# Altium PCB jeu_du_moulin_boura_PCB.PcbDoc (part 2 of 2)
Units mm, origin at the board's own origin, x right, y up, seen from the top; angles counter-clockwise.
Board outline 86 x 85 mm, 2 copper layers (Top Layer, Bottom Layer); 79 components, 60 nets, 368 pads, 129 vias.
Unrouted connection lines stored in the file: 22.
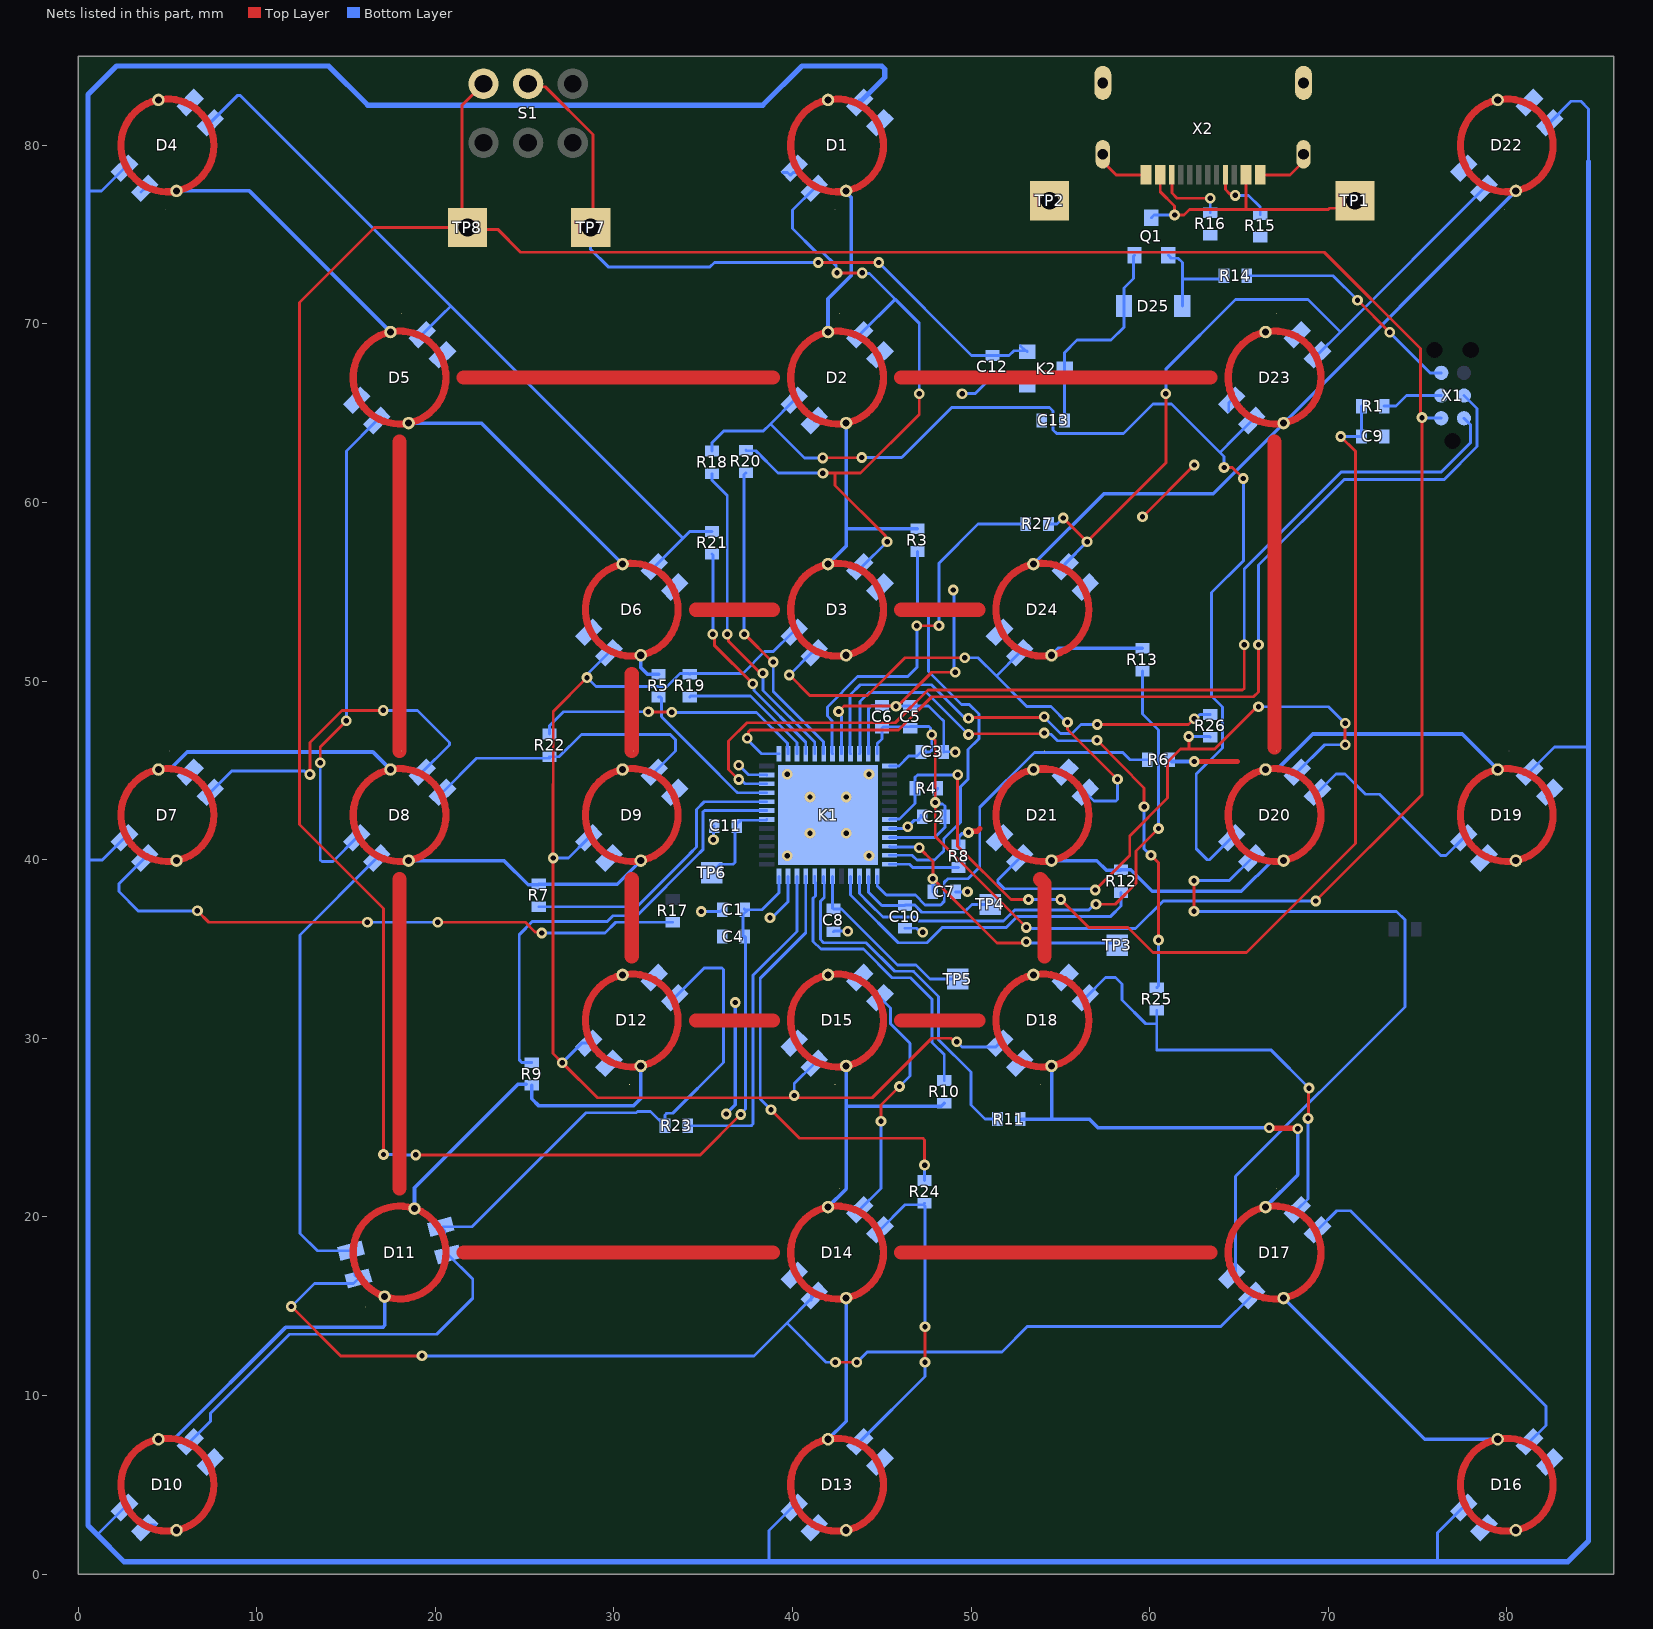
[diagram p2: the nets of this part, all layers, seen from the top]

## Via types
v1: diameter 0.6, hole 0.3, Top Layer to Bottom Layer, tented both sides, 121 vias
v2: diameter 0.6, hole 0.3, Top Layer to Bottom Layer, 8 vias

## Nets (pads, with @x,y where several pads share a name; then routed paths per layer and width w, separated by ;. In a path a pad name is that pad's centre, name@x,y a point inside that pad or via, vN(x,y) a via of type N, cw(c..) or ccw(c..) an arc to the next point about the centre after c; other vN are vias at no path point) (continued)
C2: K1.13 R6.1 | length 22.4
  Bottom Layer w0.16: K1.13@44.75,39.065 44.75,38.523 45.258,38.015 46.883,38.015 47.428,37.47 48.302,37.47 48.502,37.671 48.502,38.734 48.703,38.935 49.837,38.935 50.488,39.586 50.488,42.936 53.552,46 58.5,46 58.9,45.6 R6.1@59.865,45.6
C2_LED: K1.41 R18.1 | length 18.1
  Top Layer w0.16: v1(36.347,52.629) 36.411,52.565 36.411,52.249 38.136,50.523 38.264,50.523 v1(38.348,50.439)
  Bottom Layer w0.16: R18.1@35.5,61.615 35.5,61.25 36.347,60.403 v1(36.347,52.629) ; v1(38.348,50.439) 38.356,50.431 38.356,49.477 41.25,46.583 K1.41@41.25,45.935
C2_TOUCH: D2.6 D5.6 D8.6 D11.6 D14.6 D17.6 D20.6 D23.6 R6.2 | length 124.7
  Top Layer w0.3: v1(62.5,45.5) 64.9,45.5
  Top Layer w0.8: 18,21.6 18,38.9 ; 18,46.1 18,63.4 ; 21.6,18 38.9,18 ; 21.6,67 38.9,67 ; 46.1,18 63.4,18 ; 46.1,67 63.4,67 ; 67,46.298 67,63.4
  Bottom Layer w0.2: R6.2@61.135,45.6 61.235,45.5 v1(62.5,45.5)
C3: K1.12 R8.1 | length 3.9
  Bottom Layer w0.16: K1.12@45.435,39.75 46.55,39.75 46.735,39.565 R8.1@49.3,39.565
C3_LED: K1.39 R19.1 | length 7.7
  Bottom Layer w0.16: R19.1@34.25,49.115 34.3,49.165 37.65,49.165 40.25,46.565 K1.39@40.25,45.935
C3_TOUCH: D3.6 D6.6 D9.6 D12.6 D15.6 D18.6 D21.6 D24.6 R8.2 | length 32.1
  Top Layer w0.3: v1@49.857,41.464 v1(49.857,41.528) 49.915,41.585 50.335,41.585 50.5,41.75
  Top Layer w0.8: 31,34.6 31,38.9 ; 31,46.1 31,50.4 ; 34.6,31 38.9,31 ; 34.6,54 38.9,54 ; 46.1,31 50.4,31 ; 46.1,54 50.4,54 ; D21.6@53.879,38.912 54.121,38.67 D18.6@54.121,34.588
  Bottom Layer w0.2: R8.2@49.3,40.835 49.3,41.275 49.476,41.451 49.781,41.451 v1(49.857,41.528)
GND: C1.2 C2.2 C3.2 C4.2 C5.2 C6.2 C7.2 C8.2 C9.2 C10.2 C11.2 C12.1 C13.1 K1.8 K1.23 K1.35 K1.44 K1.47 K1.49 K2.1 R14.2 R15.1 R16.1 TP2.1 X1.5 X2.A1_B12 X2.B1_A12 X2.S1 X2.S2 X2.S3 X2.S4 | length 67.5
  Top Layer w0.16: v1(42.585,48.3) 42.885,48.6 45.9,48.6 47.8,50.5 v1(49.11,50.5) ; X2.S2@57.38,79.5 57.38,79.1 58.13,78.35 X2.B1_A12@59.8,78.35 ; v1(59.6,59.2) v1(62.5,62.1) ; X2.A1_B12@66.2,78.35 67.87,78.35 68.62,79.1 X2.S3@68.62,79.5 ; v1(71.645,71.334) v1(73.443,69.537)
  Bottom Layer w0.16: v1(34.9,37.1) 35.965,37.1 C1.2@36.065,37.2 ; v1(35.575,41.116) 35.575,41.851 C11.2@35.615,41.891 ; v1(37,45.291) 37.017,45.291 37.548,44.76 38.555,44.76 K1.35@38.565,44.75 ; v1(38.745,36.755) 38.855,36.755 39.75,37.65 K1.23@39.75,39.065 ; C8.2@42.3,35.965 42.335,36 v1(43.1,36) ; v1(42.585,48.3) 42.585,48.181 42.75,48.016 K1.44@42.75,45.935 ; K1.47@44.25,45.935 44.25,48.45 44.435,48.635 C6.2@45.019,48.635 45.054,48.6 v1(45.8,48.6) 47.625,48.6 48.175,48.05 48.186,48.05 48.47,47.766 C3.2@48.47,46.033 48.485,46.048 49.097,46.048 v1(49.117,46.027) ; K1.8@45.435,41.75 46.239,41.75 46.289,41.8 46.408,41.8 46.819,42.211 47.045,42.211 47.19,42.356 47.19,42.475 C2.2@47.265,42.4 ; C10.2@46.3,36.165 46.95,36.165 47.181,35.934 v1(47.3,35.934) ; v1(49,55.1) 49.055,55.045 49.055,50.555 v1(49.11,50.5) ; C7.2@49.135,38.2 v1(49.8,38.2) ; v1(49.5,66.1) 50.235,66.1 51.1,66.965 C12.1@51.2,66.965 ; R14.2@65.435,72.7 70.28,72.7 v1(71.645,71.334) ; v1(73.443,69.537) 75.717,67.263 X1.5@76.335,67.263
  Bottom Layer w0.203: v1(36.301,25.763) 36.301,25.781 36.8,26.281 v1(36.8,32.004)
  other v1: 46.453,41.845
  other v2: 39.715,40.215 44.285,40.215 40.985,41.485 43.015,41.485 40.985,43.515 43.015,43.515 39.715,44.785 44.285,44.785
L1: K1.11 R3.1 | length 22.6
  Bottom Layer w0.16: K1.11@45.435,40.25 46.7,40.25 46.975,39.975 47.963,39.975 48.16,40.172 48.47,40.482 48.47,41.168 48.57,41.268 48.57,41.272 48.763,41.465 48.767,41.465 49.422,42.12 49.422,44.101 49.83,44.51 49.83,46.165 50.44,46.775 50.44,48.164 49.904,48.7 49.466,48.7 47.626,50.54 47.626,51.665 47.625,51.666 47.625,53.675 47,54.3 R3.1@47,57.265
L1_LED: K1.42 R20.2 | length 17.7
  Top Layer w0.16: v1(37.297,52.629) 37.334,52.629 38.891,51.072 v1(38.928,51.072)
  Bottom Layer w0.16: v1(37.297,52.629) 37.297,61.562 R20.2@37.4,61.665 ; v1(38.928,51.072) 38.928,49.414 41.75,46.592 K1.42@41.75,45.935
L1_TOUCH: D1.5 D2.5 D3.5 R3.2 | length 20.9
  Bottom Layer w0.2: D3.5@41.993,56.55 43.007,57.565 43.007,58.5 ; D2.5@41.993,69.55 41.993,71.406 43.303,72.716 43.303,77.083 43.007,77.378 D1.5@43.007,77.45 ; D2.5@43.007,64.45 43.007,58.5 ; R3.2@47,58.535 43.042,58.535 43.007,58.5
L2: K1.33 R5.1 | length 8.9
  Bottom Layer w0.16: R5.1@32.5,49.115 32.6,49.115 32.67,49.045 32.67,48.01 35.89,44.79 35.89,44.778 36.757,43.911 36.759,43.911 36.92,43.75 K1.33@38.565,43.75
L2_LED: K1.40 R21.2 | length 13.4
  Top Layer w0.16: v1(35.545,52.629) 35.626,52.547 35.626,52.009 v1(37.776,49.859)
  Bottom Layer w0.16: R21.2@35.5,57.115 35.545,57.07 v1(35.545,52.629) ; v1(37.776,49.859) 37.842,49.793 37.842,49.482 40.75,46.574 K1.40@40.75,45.935
L2_TOUCH: D4.5 D5.5 D6.5 R5.2 | length 32.4
  Bottom Layer w0.2: D4.5@5.507,77.45 9.593,77.45 D5.5@17.493,69.55 ; D5.5@18.507,64.45 22.593,64.45 D6.5@30.493,56.55 ; D6.5@31.507,51.45 31.507,50.763 31.885,50.385 R5.2@32.5,50.385
L3: K1.32 R7.1 | length 16.4
  Bottom Layer w0.16: R7.1@25.8,37.365 31.29,37.365 34.25,40.325 34.25,40.33 34.623,40.704 34.623,42.805 35.066,43.249 K1.32@38.564,43.249
L3_LED: K1.38 R22.2 | length 15.4
  Top Layer w0.16: v1(31.936,48.283) 31.952,48.266 33.234,48.266 v1(33.25,48.25)
  Bottom Layer w0.16: R22.2@26.4,47.035 26.4,47.5 27.183,48.283 v1(31.936,48.283) ; v1(33.25,48.25) 37.985,48.25 39.715,46.52 39.715,46.285 39.75,46.25 K1.38@39.75,45.935
L3_TOUCH: D7.5 D8.5 D9.5 R7.2 | length 27.9
  Bottom Layer w0.2: D7.5@4.493,45.05 5.138,45.05 6.12,46.032 16.511,46.032 D8.5@17.493,45.05 ; D8.5@18.507,39.95 23.85,39.95 25.2,38.6 25.765,38.6 R7.2@25.8,38.635 30.192,38.635 D9.5@31.507,39.95
L4: K1.31 R9.1 | length 25.7
  Bottom Layer w0.16: R9.1@25.4,28.635 24.865,28.635 24.7,28.8 24.7,35.8 25.45,36.55 29.649,36.55 29.959,36.86 31.293,36.86 34.61,40.176 34.61,40.181 34.983,40.555 34.983,42.656 35.077,42.75 K1.31@38.565,42.75
L4_LED: K1.22 R23.2 | length 18.6
  Bottom Layer w0.16: R23.2@34.135,25.1 37.696,25.1 37.79,25.194 37.79,33.528 40.25,35.988 K1.22@40.25,39.065
L4_TOUCH: D10.5 D11.5 D12.5 R9.2 | length 35.8
  Bottom Layer w0.2: D10.5@4.493,7.55 5.358,7.55 11.617,13.809 17.047,13.809 17.164,13.926 D11.5@17.164,15.538 ; D11.5@18.836,20.462 18.836,21.636 24.617,27.417 R9.2@25.082,27.417 ; R9.2@25.4,27.365 25.4,26.619 25.806,26.213 31.09,26.213 31.507,26.63 D12.5@31.507,28.45
L5: K1.20 R10.1 | length 16.5
  Bottom Layer w0.16: K1.20@41.25,39.065 41.25,38.75 41.285,38.715 41.285,37.967 41.16,37.842 41.16,35.429 41.595,34.994 43.979,34.994 45.58,33.392 46.617,33.392 47.824,32.185 47.824,29.767 48.5,29.091 R10.1@48.5,27.635
L5_LED: K1.21 R24.2 | length 25.9
  Top Layer w0.16: v1(38.8,26) 40.4,24.4 47.306,24.4 47.4,24.306 v1(47.4,22.9)
  Bottom Layer w0.16: v1(38.8,26) 38.2,26.6 38.2,33.358 40.75,35.908 K1.21@40.75,39.065 ; R24.2@47.4,22.035 v1(47.4,22.9)
L5_TOUCH: D13.5 D14.5 D15.5 R10.2 | length 22.2
  Bottom Layer w0.2: D13.5@41.993,7.55 43.007,8.565 D14.5@43.007,15.45 ; D14.5@41.993,20.55 43.007,21.565 43.007,26.2 ; D15.5@43.007,28.45 43.007,26.2 ; R10.2@48.5,26.365 48.335,26.2 43.007,26.2
L6: K1.19 R11.1 | length 20.2
  Bottom Layer w0.16: K1.19@41.75,39.065 41.75,38.75 41.785,38.715 41.785,37.887 41.57,37.672 41.57,35.528 41.744,35.354 44.128,35.354 45.73,33.752 46.766,33.752 46.86,33.659 48.184,32.334 48.184,29.916 49.99,28.11 49.99,26.26 50.775,25.476 R11.1@51.486,25.476
L6_LED: K1.46 R25.2 | length 32.9
  Top Layer w0.16: v1(49.86,47.015) 49.898,47.054 54.062,47.054 v1(54.1,47.092) ; v1(57.057,46.695) 59.693,44.015 v1(59.693,42.96) ; v1(60.08,40.25) 60.5,39.83 v1(60.5,35.5)
  Bottom Layer w0.16: K1.46@43.75,45.935 43.785,45.97 43.785,48.866 44.284,49.365 47.511,49.365 v1(49.86,47.015) ; v1(54.1,47.092) 54.166,47.026 54.477,47.026 54.843,46.66 55.831,46.66 55.833,46.662 57.02,46.662 v1@57.055,46.696 ; v1(59.693,42.96) 59.693,40.616 60.059,40.25 v1(60.08,40.25) ; R25.2@60.4,32.835 60.5,32.935 v1(60.5,35.5)
L6_TOUCH: D16.5 D17.5 D18.5 R11.2 | length 39.1
  Top Layer w0.3: v1(66.705,24.989) 66.732,24.962 68.265,24.962 v1(68.292,24.934)
  Bottom Layer w0.2: R11.2@52.756,25.476 54.532,25.476 ; D18.5@54.507,28.45 54.532,28.425 54.532,25.476 ; D17.5@66.493,20.55 68.292,22.349 v1(68.292,24.934) ; v1(66.705,24.989) 57.111,24.989 56.624,25.476 54.532,25.476 ; D17.5@67.507,15.45 75.407,7.55 D16.5@79.493,7.55
L7: K1.16 R12.1 | length 18.9
  Bottom Layer w0.16: K1.16@43.25,39.065 43.25,38.032 43.644,37.637 45.927,35.354 47.54,35.354 48.39,36.204 51.975,36.204 52.601,36.83 57.83,36.83 58.4,37.4 R12.1@58.4,38.165
L7_LED: K1.45 R26.2 | length 25.3
  Top Layer w0.16: v1(49.86,47.923) 49.899,47.962 54.08,47.962 v1@54.1,47.942 ; v1(57.068,47.572) 62.172,47.572 v1(62.5,47.9)
  Bottom Layer w0.16: K1.45@43.25,45.935 43.215,45.97 43.215,49.215 43.8,49.8 47.786,49.8 49.579,48.008 49.776,48.008 v1(49.86,47.923) ; v1@54.1,47.942 54.141,47.942 55.013,47.07 55.661,47.07 56.163,47.572 v1(57.068,47.572) ; v1(62.5,47.9) 62.579,47.9 62.814,48.135 R26.2@63.4,48.135
  other v1: 54.1,48
L7_TOUCH: D19.5 D20.5 D21.5 R12.2 | length 30.4
  Top Layer w0.4: D21.5@53.438,45.05 D21.5@53.491,45.05 ; D21.5@53.493,45.05 54.561,45.05 ; D21.5@54.509,39.95 54.562,39.95 D21.5@54.576,39.965
  Bottom Layer w0.2: D21.5@54.507,40.066 D21.5@54.507,39.95 57.05,39.95 57.6,39.4 58.365,39.4 R12.2@58.4,39.435 58.939,39.435 60.147,38.227 65.139,38.227 66.862,39.95 D20.5@67.507,39.95 ; D20.5@66.493,45.05 67.138,45.05 69.129,47.041 77.502,47.041 D19.5@79.493,45.05
L8: K1.15 R13.1 | length 30.7
  Top Layer w0.16: v1(57,37.505) 58.075,37.505 59.245,38.675 59.245,40.495 v1(60.5,41.75)
  Bottom Layer w0.16: K1.15@43.75,39.065 43.75,38.111 44.325,37.536 45.066,36.795 46.837,36.795 47.068,36.564 51.826,36.564 52.452,37.19 56.591,37.19 56.906,37.505 v1(57,37.505) ; R13.1@59.6,50.565 59.6,48.152 60.495,47.257 60.495,41.755 v1(60.5,41.75)
L8_LED: K1.43 R27.2 | length 21.5
  Top Layer w0.16: v1(46.968,53.1) v1(48.205,53.1)
  Bottom Layer w0.16: K1.43@42.25,45.935 42.215,45.97 42.215,47.779 41.955,48.039 41.955,48.561 43.652,50.258 46.458,50.258 46.973,50.773 46.973,53.095 v1(46.968,53.1) ; v1(48.205,53.1) 48.205,56.605 50.4,58.8 R27.2@53.065,58.8
L8_TOUCH: D22.5 D23.5 D24.5 R13.2 | length 40.9
  Bottom Layer w0.2: D24.5@53.493,56.55 57.443,60.5 63.557,60.5 D23.5@67.507,64.45 D22.5@80.507,77.45 ; D24.5@54.507,51.45 54.892,51.835 R13.2@59.6,51.835
NetC7_1: C7.1 K1.10 TP3.1 | length 16.4
  Top Layer w0.16: v1(47.098,40.672) 47.865,39.905 v1(47.865,38.935) 51.458,35.342 53.033,35.342 v1(53.1,35.409)
  Bottom Layer w0.16: K1.10@45.435,40.75 45.474,40.711 47.059,40.711 v1(47.098,40.672) ; C7.1@47.865,38.2 v1(47.865,38.935) ; v1(53.1,35.409) 53.167,35.342 58.037,35.342 TP3.1@58.181,35.198
NetC8_1: C8.1 K1.18 TP5.1 | length 10.4
  Bottom Layer w0.16: K1.18@42.25,39.065 42.25,37.285 C8.1@42.3,37.235 42.756,37.235 45.879,34.112 46.915,34.112 47.709,33.319 TP5.1@49.266,33.319
NetC10_1: C10.1 K1.14 TP4.1 | length 8.4
  Bottom Layer w0.16: K1.14@44.25,39.065 44.25,38.191 44.735,37.706 45.006,37.435 C10.1@46.3,37.435 46.321,37.456 46.846,37.456 47.242,37.06 49.615,37.06 50.049,37.494 TP4.1@51.09,37.494
NetC11_1: C11.1 K1.30 TP6.1 | length 5.5
  Bottom Layer w0.16: TP6.1@35.473,39.262 35.955,39.744 36.681,39.744 36.775,39.838 36.775,41.781 C11.1@36.885,41.891 36.885,41.991 37.105,42.211 38.526,42.211 K1.30@38.565,42.25
NetC12_2: C12.2 K2.2 S1.2 TP7.1 | length 39.8
  Top Layer w0.16: S1.2@25.2,83.45 25.363,83.287 26.162,83.287 28.83,80.619 28.83,75.53 28.166,74.866 TP7.1@28.166,74.725 ; v1(41.453,73.44) v1(44.831,73.44)
  Bottom Layer w0.16: TP7.1@28.7,75.4 28.7,74.188 29.688,73.2 35.391,73.2 35.631,73.44 v1(41.453,73.44) ; v1(44.831,73.44) 50.036,68.235 C12.2@51.2,68.235 52.135,68.235 52.4,68.5 K2.2@53.05,68.5 ; K2.2@52.78,68.77 K2.2@53.05,68.5 ; K2.2@53.15,68.45 53.1,68.5 K2.2@53.05,68.5
NetC13_2: C13.2 D25.1 K2.3 Q1.2 | length 12
  Bottom Layer w0.16: C13.2@55.235,64.6 K2.3@55.235,67.485 ; K2.3@55.25,67.5 K2.3@55.235,67.485 ; Q1.2@59.15,73.85 59.1,73.8 59.1,72.548 58.565,72.013 D25.1@58.565,71 58.565,69.817 57.848,69.1 55.943,69.1 55.235,68.392 K2.3@55.235,67.485
NetD1_1: D1.1 D1.4 D2.1 D2.4 D3.1 D3.4 R20.1 | length 44.9
  Top Layer w0.16: v1(41.707,61.646) 42.393,61.646 ; v1(42.494,72.86) v1(43.903,72.86) ; v1(45.3,57.8) 45.216,57.884 45.216,58.137 42.393,60.96 42.393,61.646 ; v1(47.1,66.1) 47.1,64.931 43.815,61.646 42.393,61.646
  Bottom Layer w0.16: R20.1@37.4,62.935 37.435,62.9 37.944,62.9 39.198,61.646 v1(41.707,61.646) ; D1.1@39.46,78.487 39.728,78.487 39.884,78.331 40.044,78.491 40.312,78.491 40.472,78.331 40.492,78.331 ; D1.1@40.096,78.727 40.492,78.331 ; v1(42.494,72.86) 42.452,72.902 42.452,73.261 41.693,74.02 41.334,74.02 40.005,75.349 40.005,76.374 D1.4@41.227,77.596 40.492,78.331 ; v1(43.903,72.86) 43.932,72.83 44.315,72.83 45.745,71.399 ; D3.1@44.904,55.273 D3.4@43.773,56.404 43.904,56.404 v1(45.3,57.8) ; D2.1@44.904,68.273 D2.4@43.773,69.404 45.757,71.388 47.1,70.045 ; v1(47.1,66.1) 47.1,70.029
NetD1_2: D1.2 D1.3 D4.2 D4.3 D7.2 D7.3 D10.2 D10.3 D13.2 D13.3 D16.2 D16.3 D19.2 D19.3 D22.2 D22.3 R17.2 | length 365.4
  Top Layer w0.16: v1(6.68,37.135) 7.315,36.5 v1(16.2,36.5) ; v1(20.142,36.5) 25.044,36.5 25.585,35.959 25.911,35.959 v1(25.97,35.9)
  Bottom Layer w0.16: 0.55,40.068 0.639,39.98 1.348,39.98 D7.3@2.596,41.227 D7.2@3.727,40.096 2.286,38.655 2.286,38.219 3.37,37.135 v1(6.68,37.135) ; 0.55,77.419 0.575,77.445 1.313,77.445 D4.3@2.596,78.727 D4.2@3.727,77.596 D4.2@3.515,77.384 ; 0.999,2.269 1.138,2.269 D10.3@2.596,3.727 D10.2@3.727,2.596 3.873,2.741 D10.2@4.325,2.741 ; v1(16.2,36.5) v1(20.142,36.5) ; v1(25.97,35.9) 29.508,35.9 30.108,36.5 R17.2@33.299,36.5 ; 38.633,0.686 38.684,0.737 38.684,2.438 39.973,3.727 D13.3@40.096,3.727 D13.2@41.227,2.596 ; D1.2@43.773,82.486 D1.2@43.773,82.404 D1.3@44.904,81.273 ; 76.124,0.686 76.124,2.311 77.54,3.727 D16.3@77.596,3.727 D16.2@78.727,2.596 D16.2@78.699,2.596 ; D22.2@81.273,82.404 D22.3@82.404,81.273 83.605,82.474 84.15,82.474 84.582,82.042 84.582,79.095 ; D19.3@82.404,43.773 D19.2@81.273,44.904 82.673,46.304 84.557,46.304 84.582,46.279
  Bottom Layer w0.3: D1.2@43.773,82.486 43.855,82.486 45.169,83.8 45.169,84.274 44.993,84.45 40.533,84.45 38.333,82.25 16.229,82.25 14.029,84.45 2.159,84.45 0.55,82.841 0.55,77.419 0.55,40.068 0.55,2.718 0.999,2.269 2.582,0.686 38.633,0.686 76.124,0.686 83.411,0.686 84.582,1.857 84.582,46.279 84.582,79.095
NetD2_2: D2.2 D2.3 D5.2 D5.3 D8.2 D8.3 D11.2 D11.3 D14.2 D14.3 D17.2 D17.3 D20.2 D20.3 D23.2 D23.3 R18.2 | length 240.7
  Top Layer w0.16: v1(11.942,14.982) 14.707,12.217 v1(19.253,12.217) ; v1(13.56,45.432) 13.56,46.319 v1(15.023,47.782) ; v1(41.7,62.5) 41.713,62.513 43.862,62.513 v1(43.875,62.526) ; v1(42.407,11.862) v1(43.607,11.862) ; v1(62.484,37.108) v1(62.484,38.827) ; v1(64.173,61.964) 64.63,61.964 v1(65.25,61.344)
  Bottom Layer w0.16: v1(11.942,14.982) 13.233,16.274 15.415,16.274 D11.2@15.696,16.554 15.489,16.761 15.489,17.893 D11.3@15.282,18.1 13.396,18.1 12.421,19.075 12.421,35.789 D8.2@16.727,40.096 D8.3@15.596,41.227 14.265,39.896 13.654,39.896 13.56,39.99 v1(13.56,45.432) ; v1(15.023,47.782) 15.023,62.892 D5.2@16.727,64.596 D5.3@15.596,65.727 ; v1(19.253,12.217) 37.849,12.217 39.689,14.058 ; R18.2@35.5,62.885 35.5,63.35 36.15,64 38.369,64 38.772,64.403 ; D14.3@40.096,16.727 41.058,15.765 D14.2@41.058,15.427 ; D14.2@41.058,15.341 D14.2@41.058,15.427 ; D14.2@41.227,15.596 D14.2@41.058,15.427 ; D2.2@41.227,64.555 D2.2@41.227,64.596 D2.3@40.096,65.727 38.772,64.403 ; v1(41.7,62.5) 40.675,62.5 38.772,64.403 ; v1(42.407,11.862) 41.885,11.862 39.689,14.058 ; v1(43.607,11.862) 44.187,12.442 51.736,12.442 53.165,13.871 64.002,13.871 D17.2@65.727,15.596 D17.3@64.596,16.727 64.808,16.939 64.808,22.271 74.295,31.758 74.295,36.637 73.824,37.108 v1(62.484,37.108) ; v1(43.875,62.526) 46.117,62.526 48.922,65.33 54.402,65.33 54.6,65.132 54.6,64.068 54.798,63.87 58.542,63.87 60.187,65.515 61.236,65.515 63.942,62.81 ; v1(62.484,38.827) 64.458,38.827 D20.2@65.727,40.096 D20.3@64.596,41.227 63.363,39.995 63.231,39.995 62.612,40.614 62.612,44.791 64.08,46.26 64.08,48.551 63.471,49.16 63.471,54.96 65.25,56.739 v1(65.25,61.344) ; v1(64.173,61.964) 64.173,62.579 63.942,62.81 ; D23.3@64.436,65.115 64.436,65.567 D23.3@64.596,65.727 D23.2@65.727,64.596 64.784,63.653 63.942,62.81 ; 39.689,14.058 D14.2@41.058,15.427
NetD3_2: D3.2 D3.3 D6.2 D6.3 D9.2 D9.3 D12.2 D12.3 D15.2 D15.3 D18.2 D18.3 D21.2 D21.3 D24.2 D24.3 R19.2 | length 113.8
  Top Layer w0.16: v1(28.499,50.199) 26.603,48.304 26.603,44.227 26.6,44.224 v1(26.6,40.1) 26.6,29.146 v1(27.112,28.634) 29.076,26.67 39.851,26.67 39.981,26.8 v1(40.1,26.8) 40.219,26.8 40.349,26.67 44.47,26.67 47.8,30 48.886,30 49.086,29.8 v1(49.2,29.8) ; v1(39.827,50.343) 40.97,49.2 44.2,49.2 46.308,51.308 v1(49.657,51.308) ; v1(55.4,47.7) 55.412,47.688 55.412,47.288 v1(58.2,44.5)
  Bottom Layer w0.16: v1(26.6,40.1) 27.469,40.1 D9.3@28.596,41.227 D9.2@29.727,40.096 ; v1(27.112,28.634) 28.206,29.727 D12.3@28.596,29.727 D12.2@29.727,28.596 ; D6.3@28.596,52.727 D6.2@29.727,51.596 28.583,50.452 28.583,50.283 v1(28.499,50.199) 28.993,49.705 32.973,49.705 33.703,50.435 34.2,50.435 R19.2@34.25,50.385 34.3,50.435 37.227,50.435 38.444,51.652 38.924,51.652 39.999,52.727 D3.3@40.096,52.727 D3.2@41.227,51.596 41.08,51.596 v1(39.827,50.343) ; D15.3@40.096,29.727 D15.2@41.227,28.596 ; v1(40.1,26.8) 40.1,27.462 D15.2@41.227,28.589 ; v1(49.2,29.8) 49.213,29.8 49.498,29.515 51.384,29.515 D18.3@51.596,29.727 D18.2@52.727,28.596 ; v1(49.657,51.308) 50.397,51.308 51.418,50.287 ; D24.3@51.596,52.727 D24.2@52.727,51.596 51.418,50.287 ; D21.2@55.273,44.904 D21.3@56.404,43.773 56.895,43.282 58.106,43.282 58.2,43.375 v1(58.2,44.5) ; v1(55.4,47.7) 55.353,47.7 54.473,48.58 53.125,48.58 51.418,50.287
NetD4_1: D4.1 D4.4 D5.1 D5.4 D6.1 D6.4 R21.1 | length 48.4
  Bottom Layer w0.16: D4.4@6.273,82.404 D4.1@7.404,81.273 8.935,82.804 9.068,82.804 15.685,76.187 20.892,70.98 33.87,58.002 ; D5.1@20.404,68.273 D5.4@19.273,69.404 20.413,70.544 20.798,70.929 ; D6.1@33.404,55.273 D6.4@32.273,56.404 33.87,58.002 ; R21.1@35.5,58.385 34.254,58.385 33.87,58.002
NetD7_1: D7.1 D7.4 D8.1 D8.4 D9.1 D9.4 R22.1 | length 41.1
  Top Layer w0.16: v1(12.98,44.777) 12.98,46.559 14.783,48.362 v1(17.094,48.362)
  Bottom Layer w0.16: D7.4@6.273,44.904 D7.1@7.404,43.773 8.589,44.958 12.679,44.958 12.861,44.777 v1(12.98,44.777) ; v1(17.094,48.362) 18.999,48.362 20.798,46.562 20.798,46.43 D8.4@19.273,44.904 D8.1@20.404,43.773 22.311,45.68 R22.1@26.4,45.68 ; R22.1@26.4,45.765 26.93,45.765 28.181,47.015 33.155,47.015 33.452,46.719 33.452,46.083 D9.4@32.273,44.904 D9.1@33.404,43.773
NetD10_1: D10.1 D10.4 D11.1 D11.4 D12.1 D12.4 R23.1 | length 56.4
  Bottom Layer w0.16: D10.1@7.404,6.273 D10.4@6.273,7.404 7.404,8.536 7.404,8.988 11.845,13.429 20.084,13.429 22.098,15.443 22.098,16.521 D11.1@20.718,17.9 ; D11.1@20.511,18.107 20.511,19.239 D11.4@20.304,19.446 22.062,19.446 28.449,25.833 31.247,25.833 31.322,25.908 32.057,25.908 R23.1@32.865,25.1 32.865,25.713 32.959,25.806 33.299,25.806 36.144,28.651 36.144,33.841 36.05,33.934 35.066,33.934 D12.1@33.404,32.273 D12.4@32.273,33.404
NetD13_1: D13.1 D13.4 D14.1 D14.4 D15.1 D15.4 R24.1 | length 36.5
  Top Layer w0.16: v1(44.958,25.349) 44.958,26.267 v1(45.995,27.305) ; v1(47.422,11.862) v1(47.422,13.843)
  Bottom Layer w0.16: D15.4@43.773,33.404 D15.1@44.904,32.273 45.488,31.689 45.488,30.814 46.584,29.718 46.584,27.893 v1(45.995,27.305) ; D13.1@44.904,6.273 D13.4@43.773,7.404 47.422,11.053 v1(47.422,11.862) ; v1(44.958,25.349) 44.958,21.589 D14.4@43.773,20.404 D14.1@44.904,19.273 46.313,20.681 47.335,20.681 47.422,20.594 v1(47.422,13.843) ; R24.1@47.335,20.7 R24.1@47.4,20.765
NetD16_1: D16.1 D16.4 D17.1 D17.4 D18.1 D18.4 R25.1 | length 49.7
  Top Layer w0.16: v1(68.872,25.514) 68.9,25.543 68.9,27.183 v1(68.928,27.211)
  Bottom Layer w0.16: D18.4@55.273,33.404 D18.1@56.404,32.273 57.532,33.401 58.09,33.401 58.458,33.033 58.458,32.14 59.786,30.811 60.4,30.811 ; R25.1@60.4,31.565 60.4,30.811 ; v1(68.872,25.514) 68.872,21.003 D17.4@68.273,20.404 D17.1@69.404,19.273 70.477,20.345 71.247,20.345 82.194,9.398 82.194,8.326 D16.4@81.273,7.404 D16.1@82.404,6.273 ; v1(68.928,27.211) 66.785,29.354 60.4,29.354 60.4,30.811
NetD19_1: D19.1 D19.4 D20.1 D20.4 D21.1 D21.4 R26.1 | length 50.1
  Top Layer w0.16: v1(56.957,38.304) 58.885,40.232 58.885,41.333 61,43.447 61,45.465 61.735,46.2 62.2,46.2 ; v1(62.2,46.9) 62.2,46.2 ; v1(66.1,48.565) 66.015,48.565 63.65,46.2 62.2,46.2 ; v1(70.95,46.441) v1(70.95,47.641)
  Bottom Layer w0.16: D21.1@51.596,41.227 D21.4@52.727,40.096 51.501,38.87 51.501,38.737 51.865,38.374 56.887,38.374 v1(56.957,38.304) ; v1(62.2,46.9) 63.365,46.9 R26.1@63.4,46.865 ; v1(66.1,48.565) 70.026,48.565 v1(70.95,47.641) ; v1(70.95,46.441) 69.809,46.441 D20.4@68.273,44.904 D20.1@69.404,43.773 70.437,44.806 70.942,44.806 72.085,43.663 72.873,43.663 76.302,40.234 76.602,40.234 D19.1@77.596,41.227 D19.4@78.727,40.096
NetD22_1: D22.1 D22.4 D23.1 D23.4 D24.1 D24.4 R27.1 | length 46.4
  Top Layer w0.16: v1(55.162,59.138) v1(56.501,57.801) ; v1(56.501,57.801) 60.909,62.21 v1(60.909,66.095)
  Bottom Layer w0.16: R27.1@54.335,58.8 54.823,58.8 v1(55.162,59.138) ; D24.1@56.404,55.273 D24.4@55.273,56.404 55.273,56.573 v1(56.501,57.801) ; v1(60.909,66.095) 60.909,67.462 64.811,71.364 68.877,71.364 70.686,69.555 ; D23.4@68.273,69.404 D23.1@69.404,68.273 70.686,69.555 ; D22.1@77.596,78.727 D22.4@78.727,77.596 70.686,69.555
NetD25_2: D25.2 Q1.1 R14.1 | length 5.8
  Bottom Layer w0.16: Q1.1@61.05,73.85 61.216,73.684 61.596,73.684 61.835,73.445 61.835,72.516 ; D25.2@61.835,71 61.835,72.516 ; R14.1@64.165,72.7 63.981,72.516 61.835,72.516
NetQ1_3: Q1.3 TP1.1 X2.A4_B9 X2.B4_A9 | length 16.3
  Top Layer w0.16: X2.B4_A9@60.6,78.35 60.6,77.4 61.4,76.6 v1(61.4,76.1) 61.929,76.1 62.241,76.412 65.4,76.412 ; X2.A4_B9@65.4,78.35 65.4,76.412 ; TP1.1@71.5,76.75 71.23,76.48 70.08,76.48 70.012,76.412 65.4,76.412
  Bottom Layer w0.16: Q1.3@60.1,75.95 60.25,76.1 v1(61.4,76.1)
NetR1_2: R1.2 X1.3 | length 3.4
  Bottom Layer w0.16: R1.2@73.135,65.4 73.8,65.4 74.393,65.993 X1.3@76.335,65.993
NetR15_2: R15.2 X2.A5 | length 3.6
  Top Layer w0.16: X2.A5@64.25,78.35 64.25,77.527 64.493,77.284 64.716,77.284 v1(64.8,77.2)
  Bottom Layer w0.16: v1(64.8,77.2) 65.542,77.2 66.2,76.542 R15.2@66.2,76.135
NetR16_2: R16.2 X2.B5 | length 4.1
  Top Layer w0.16: X2.B5@61.25,78.35 61.25,77.336 61.544,77.042 v1(63.4,77.042)
  Bottom Layer w0.16: R16.2@63.4,76.235 v1(63.4,77.042)
R\S\T\: C9.1 K1.7 R1.1 R4.2 | length 63
  Top Layer w0.16: v1(49.25,44.75) 49.25,40.754 52.234,37.77 v1(53.221,37.77) ; v1(55.021,37.77) 56.591,36.2 58.8,36.2 60.2,34.8 65.424,34.8 71.53,40.906 71.53,62.87 v1(70.7,63.7)
  Bottom Layer w0.16: K1.7@45.435,42.25 45.47,42.285 46.002,42.285 46.865,43.148 46.865,44.615 47,44.75 v1(49.25,44.75) ; v1(53.221,37.77) v1(55.021,37.77) ; v1(70.7,63.7) C9.1@71.865,63.7 R1.1@71.865,65.4
SWCLK: K1.37 X1.4 | length 57.3
  Top Layer w0.16: v1(37.47,46.8) 37.547,46.877 37.547,47.166 37.641,47.26 45.931,47.26 47.799,49.128 65.828,49.128 66.1,49.4 v1(66.1,52.045)
  Bottom Layer w0.16: v1(37.47,46.8) 37.47,46.73 38.265,45.935 K1.37@39.25,45.935 ; v1(66.1,52.045) 66.1,56.5 70.9,61.3 76.5,61.3 78.335,63.135 78.335,65.263 X1.4@77.605,65.993
SWDIO: K1.34 X1.2 | length 58
  Top Layer w0.16: v1(36.997,44.491) 36.98,44.491 36.42,45.051 36.42,45.531 36.422,45.534 36.422,46.643 37.449,47.67 38.495,47.67 45.761,47.67 47.591,49.5 65.206,49.5 65.3,49.594 v1(65.3,52.045)
  Bottom Layer w0.16: v1(36.997,44.491) 37.098,44.491 37.339,44.25 K1.34@38.565,44.25 ; v1(65.3,52.045) 65.3,56.28 67.942,58.922 70.73,61.71 76.33,61.71 77.97,63.35 77.97,64.357 X1.2@77.605,64.723
VCC: C1.1 C2.1 C3.1 C4.1 C5.1 C6.1 K1.1 K1.9 K1.24 K1.48 R4.1 S1.3 TP8.1 X1.1 | length 240.2
  Top Layer w0.16: v1(17.1,23.495) 17.1,37.276 12.4,41.976 12.4,71.2 16.6,75.4 TP8.1@21.8,75.4 21.9,75.3 23.5,75.3 24.78,74.02 69.78,74.02 75.174,68.626 75.174,64.838 v1(75.253,64.758) 75.253,43.641 v1(69.3,37.688) ; v1(18.9,23.47) 34.84,23.47 v1(37.1,25.73) ; TP8.1@21.8,75.6 21.5,75.9 21.5,82.25 S1.3@22.7,83.45 ; v1(47.8,47) 47.8,46.881 48,46.681 v1(48,43.2) 48,41.309 50.725,38.584 v1(53.1,36.209)
  Bottom Layer w0.16: v1(17.1,23.495) 18.09,23.495 18.115,23.47 v1(18.9,23.47) ; v1(37.1,25.73) 37.1,25.753 37.38,26.033 37.38,35.655 C4.1@37.335,35.7 ; C4.1@37.285,35.65 37.235,35.7 37.235,36.935 C1.1@37.5,37.2 ; C1.1@37.3,37.235 C1.1@37.335,37.2 C1.1@37.5,37.2 ; K1.24@39.25,39.065 39.25,38.15 38.3,37.2 C1.1@37.5,37.2 ; K1.48@44.75,45.935 44.75,46.5 45.019,46.769 C6.1@45.019,47.365 45.1,47.446 46.581,47.446 46.6,47.465 47.634,47.465 47.728,47.371 47.728,47.072 v1(47.8,47) 47.8,46.126 47.706,46.033 C3.1@47.2,46.033 47.2,46.025 46.98,45.805 46.515,45.805 45.96,45.25 K1.1@45.435,45.25 ; K1.9@45.437,41.252 47.97,41.252 48.535,41.817 48.535,43.006 48.412,43.129 48.071,43.129 v1(48,43.2) 48,43.865 R4.1@48.135,44 ; v1(53.1,36.209) 53.168,36.142 59.216,36.142 60.762,37.688 v1(69.3,37.688) ; v1(75.253,64.758) 75.271,64.74 76.317,64.74 X1.1@76.335,64.723
pads on no net: K1.2 K1.3 K1.4 K1.5 K1.6 K1.25 K1.26 K1.27 K1.28 K1.36 S1.1 S1.4 S1.5 S1.6 X1. X1.6 X2.A6 X2.A7 X2.A8 X2.B6 X2.B7 X2.B8

## Polygon pours and split planes (outlines as drawn)
GND on Bottom Layer "Top Layer-No Net 1" (solid, shelved, pour order 0): 0,0 0,100 86,100 86,0
GND on Top Layer "Top Layer-No Net 1" (solid, shelved, pour order 2): 0,0 100,0 100,86 0,86

## Keep-outs
Keep-Out Layer:
  lines w0.1: 38.035,45.485 38.035,45.917 38.645,45.917 38.645,45.485 38.035,45.485 ; 38.735,46.228 39.167,46.228 39.167,46.838 38.735,46.838 38.735,46.228 ; 46.043,42.602 46.043,45.366 46.315,45.366 46.315,42.602 46.043,42.602

## Silkscreen, mask and mechanical layers (free items; w line width, h text height)
Top Overlay:
  lines w1: 4.879,8.998 4.879,38.338 ; 4.879,46.498 4.879,75.838 ; 9,42.5 14,42.5 ; 9.147,80 19.5,80 ; 9.162,4.879 38.502,4.879 ; 18,22 18,38.5 ; 18,46.5 18,63 ; 22,18 38.5,18 ; 22,42.5 27,42.5 ; 22,67 38.5,67 ; 30.75,80 38.353,80 ; 31,35 31,38.5 ; 31,46.5 31,50 ; 35,31 38.5,31 ; 35.147,54 38.5,54 ; 42.5,9 42.5,14 ; 42.5,22 42.5,27 ; 42.5,58 42.5,63 ; 42.5,71 42.5,76 ; 46.5,18 63,18 ; 46.5,67 63,67 ; 46.52,31 50,31 ; 46.647,54 50,54 ; 46.647,80 56.25,80 ; 46.662,4.879 76.002,4.879 ; 54,35 54,38.5 ; 54,46.647 54,49.853 ; 58,42.5 63,42.5 ; 67,22 67,38.5 ; 67,46.5 67,63 ; 70,80 76,80 ; 71,42.5 76,42.5 ; 79.879,8.998 79.879,38.338 ; 79.879,46.498 79.879,75.838
Bottom Overlay:
  text "Jeu du Moulin EMF / Alexandre Bourquenoud  / TPI 2025" at 30.625,3 h1
Outline:
  drawing of 872 lines, arcs and shapes, not listed

## Text inside footprints (layer, text, board x,y; h text height)
D1: Bottom Overlay "R" at 44.48,79.717 h1 r225; Bottom Overlay "G" at 39.457,80.463 h1 r225; Bottom Assembly "G" at 39.726,80.744 h1 r225; Bottom Assembly "R" at 44.268,79.646 h1 r225
D2: Bottom Overlay "R" at 40.52,67.283 h1 r45; Bottom Overlay "G" at 45.543,66.537 h1 r45; Bottom Assembly "G" at 45.274,66.256 h1 r45; Bottom Assembly "R" at 40.732,67.354 h1 r45
D3: Bottom Overlay "G" at 45.543,53.537 h1 r45; Bottom Overlay "R" at 40.52,54.283 h1 r45; Bottom Assembly "R" at 40.52,54.283 h1 r45; Bottom Assembly "G" at 45.543,53.537 h1 r45
D4: Bottom Overlay "R" at 3.02,80.283 h1 r45; Bottom Overlay "G" at 8.043,79.537 h1 r45; Bottom Assembly "G" at 7.774,79.256 h1 r45; Bottom Assembly "R" at 3.232,80.354 h1 r45
D5: Bottom Overlay "G" at 21.043,66.537 h1 r45; Bottom Overlay "R" at 16.02,67.283 h1 r45; Bottom Assembly "G" at 20.774,66.256 h1 r45; Bottom Assembly "R" at 16.232,67.354 h1 r45
D6: Bottom Overlay "R" at 29.02,54.283 h1 r45; Bottom Overlay "G" at 34.043,53.537 h1 r45; Bottom Assembly "G" at 33.774,53.256 h1 r45; Bottom Assembly "R" at 29.232,54.354 h1 r45
D7: Bottom Overlay "G" at 8.043,42.037 h1 r45; Bottom Overlay "R" at 3.02,42.783 h1 r45; Bottom Assembly "G" at 7.774,41.756 h1 r45; Bottom Assembly "R" at 3.232,42.854 h1 r45
D8: Bottom Overlay "R" at 16.02,42.783 h1 r45; Bottom Overlay "G" at 21.043,42.037 h1 r45; Bottom Assembly "R" at 16.232,42.854 h1 r45; Bottom Assembly "G" at 20.774,41.756 h1 r45
D9: Bottom Overlay "G" at 34.043,42.037 h1 r45; Bottom Overlay "R" at 29.02,42.783 h1 r45; Bottom Assembly "G" at 33.774,41.756 h1 r45; Bottom Assembly "R" at 29.232,42.854 h1 r45
D10: Bottom Overlay "G" at 8.043,4.537 h1 r45; Bottom Overlay "R" at 3.02,5.283 h1 r45; Bottom Assembly "G" at 7.774,4.256 h1 r45; Bottom Assembly "R" at 3.232,5.354 h1 r45
D11: Bottom Overlay "G" at 20.404,16.078 h1 r15; Bottom Overlay "R" at 16.427,19.235 h1 r15; Bottom Assembly "R" at 16.646,19.19 h1 r15; Bottom Assembly "G" at 20.03,15.969 h1 r15
D12: Bottom Overlay "R" at 29.02,31.283 h1 r45; Bottom Overlay "G" at 34.043,30.537 h1 r45; Bottom Assembly "G" at 33.774,30.256 h1 r45; Bottom Assembly "R" at 29.232,31.354 h1 r45
D13: Bottom Overlay "R" at 40.52,5.283 h1 r45; Bottom Overlay "G" at 45.543,4.537 h1 r45; Bottom Assembly "G" at 45.274,4.256 h1 r45; Bottom Assembly "R" at 40.732,5.354 h1 r45
D14: Bottom Overlay "R" at 40.52,18.283 h1 r45; Bottom Overlay "G" at 45.543,17.537 h1 r45; Bottom Assembly "R" at 40.732,18.354 h1 r45; Bottom Assembly "G" at 45.274,17.256 h1 r45
D15: Bottom Overlay "R" at 40.52,31.283 h1 r45; Bottom Overlay "G" at 45.543,30.537 h1 r45; Bottom Assembly "R" at 40.732,31.354 h1 r45; Bottom Assembly "G" at 45.274,30.256 h1 r45
D16: Bottom Overlay "G" at 83.043,4.537 h1 r45; Bottom Overlay "R" at 78.02,5.283 h1 r45; Bottom Assembly "G" at 82.774,4.256 h1 r45; Bottom Assembly "R" at 78.232,5.354 h1 r45
D17: Bottom Overlay "R" at 65.02,18.283 h1 r45; Bottom Overlay "G" at 70.043,17.537 h1 r45; Bottom Assembly "R" at 65.232,18.354 h1 r45; Bottom Assembly "G" at 69.774,17.256 h1 r45
D18: Bottom Overlay "G" at 57.043,30.537 h1 r45; Bottom Overlay "R" at 52.02,31.283 h1 r45; Bottom Assembly "R" at 52.232,31.354 h1 r45; Bottom Assembly "G" at 56.774,30.256 h1 r45
D19: Bottom Overlay "R" at 81.98,42.217 h1 r225; Bottom Overlay "G" at 76.957,42.963 h1 r225; Bottom Assembly "G" at 77.226,43.244 h1 r225; Bottom Assembly "R" at 81.768,42.146 h1 r225
D20: Bottom Overlay "R" at 65.02,42.783 h1 r45; Bottom Overlay "G" at 70.043,42.037 h1 r45; Bottom Assembly "R" at 65.232,42.854 h1 r45; Bottom Assembly "G" at 69.774,41.756 h1 r45
D21: Bottom Overlay "G" at 50.957,42.963 h1 r225; Bottom Overlay "R" at 55.98,42.217 h1 r225; Bottom Assembly "R" at 55.768,42.146 h1 r225; Bottom Assembly "G" at 51.226,43.244 h1 r225
D22: Bottom Overlay "G" at 76.957,80.463 h1 r225; Bottom Overlay "R" at 81.98,79.717 h1 r225; Bottom Assembly "G" at 77.226,80.744 h1 r225; Bottom Assembly "R" at 81.768,79.646 h1 r225
D23: Bottom Overlay "G" at 70.043,66.537 h1 r45; Bottom Overlay "R" at 65.02,67.283 h1 r45; Bottom Assembly "G" at 69.774,66.256 h1 r45; Bottom Assembly "R" at 65.232,67.354 h1 r45
D24: Bottom Overlay "G" at 57.043,53.537 h1 r45; Bottom Overlay "R" at 52.02,54.283 h1 r45; Bottom Assembly "R" at 52.232,54.354 h1 r45; Bottom Assembly "G" at 56.774,53.256 h1 r45
D25: Bottom Overlay "K." at 57.55,71.85 h1 r90